# EAGLE board VCF-LM324-Stereo-LFO-PinHdr (EAGLE 7.2.0)
Voltage-Controlled Low-Pass Filter with LFO using LM324 Quad-Opamp (Stereo) http://electro-music.com/forum/topic-45231-0.html&postdays=0&postorder=asc&highlight=
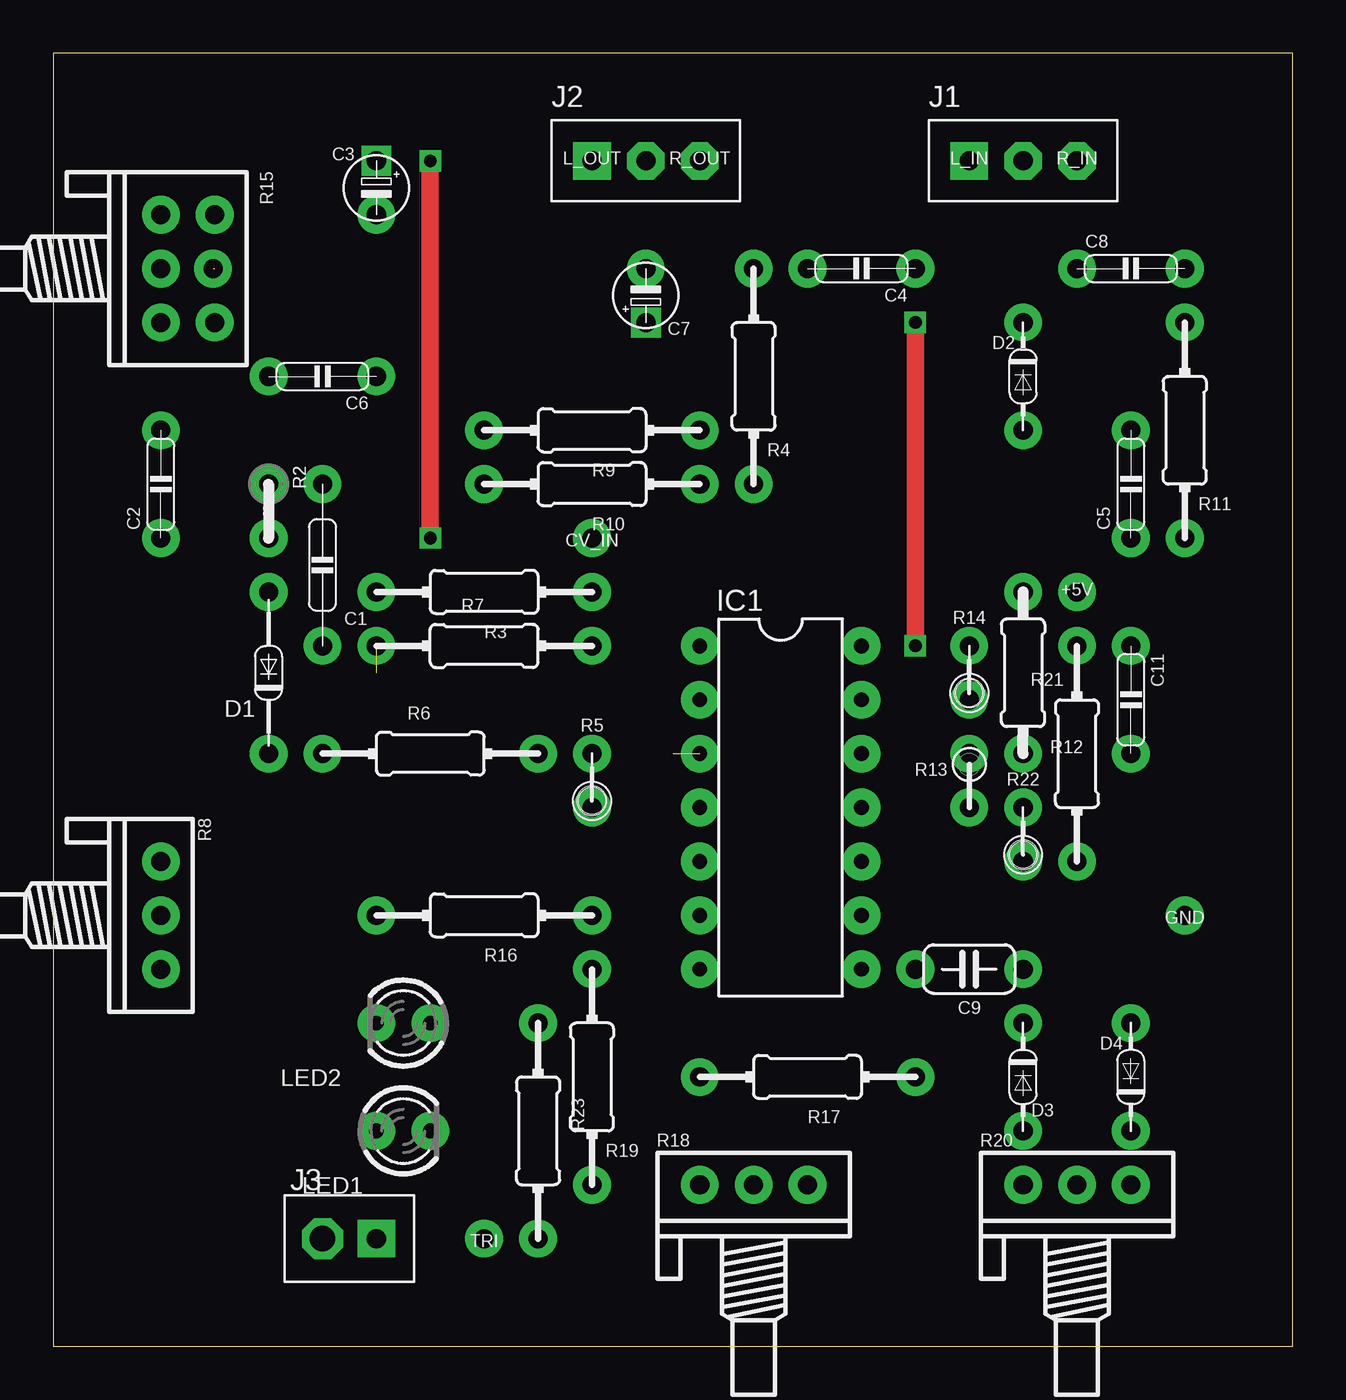
[diagram p0: board, top side]
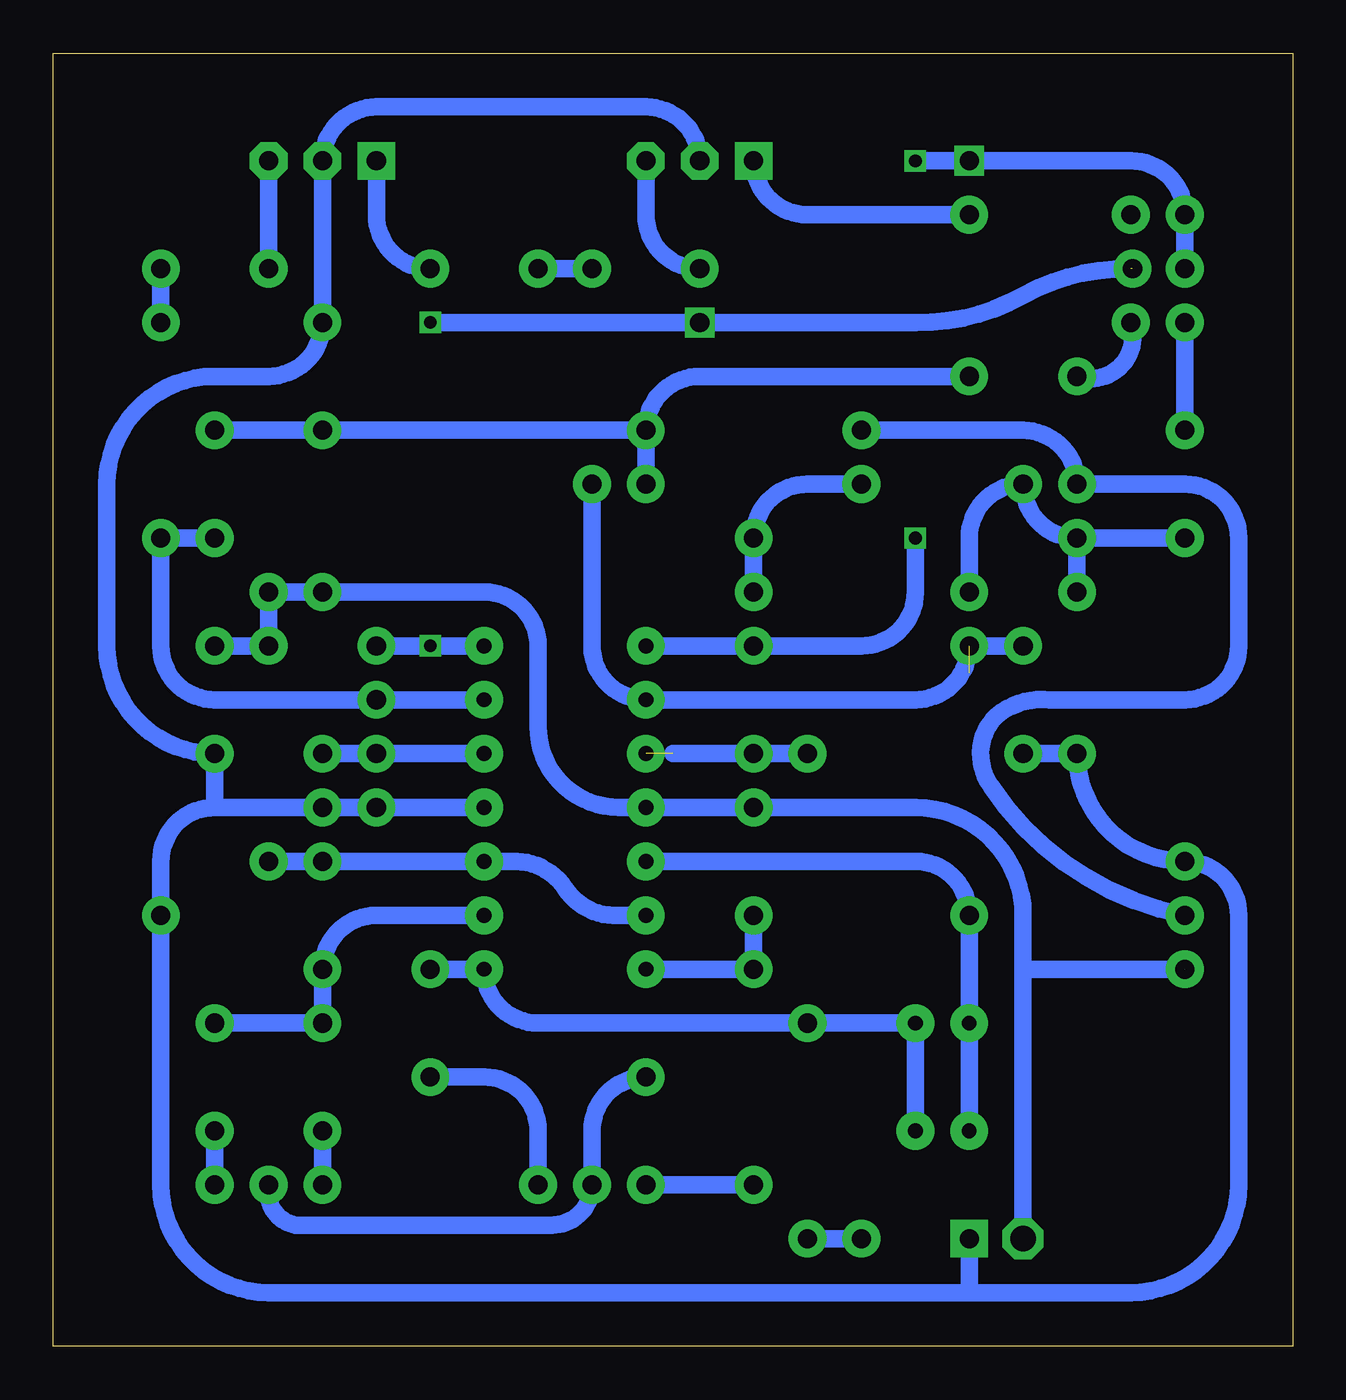
[diagram p1: board, bottom side, seen from below]

Size 58.42 x 60.96 mm. Coordinates in mm from the lower left corner, seen from the top.
Outline: 0,0 58.42,0 58.42,60.96 0,60.96 0,0
Copper layers (1*16): Top 0.035mm / dielectric 1.5mm / Bottom 0.035mm
Design rules "default *": minimum track width 10mil, minimum drill 24mil, track to track 8mil, track to pad 8mil, pad to pad 8mil, via to via 8mil, smd to smd 8mil, copper to edge 40mil, drill to drill 8mil, minimum pad ring 10mil, minimum via ring 8mil, stop-mask expansion 0mil, vias tented up to drill 0mil, thermal gap 10mil

## Footprints (pad centres in the part's own frame; a part is rotated, then mirrored left to right if it is on the bottom)
SPAD = drill 0.9 pad 1.778: 1 0,0
C075-020X044/V = drill 0.9 pad 1.778: 1 0,3.81; 2 0,-3.81
C050-020X044 = drill 0.9 pad 1.778: 1 -2.54,0; 2 2.54,0
E2,5-3/V = drill 0.9 square: + 0,1.27 | drill 0.9 pad 1.778: - 0,-1.27
C050-024X044 = drill 0.9 pad 1.778: 1 -2.54,0; 2 2.54,0
DO34-7V = drill 0.9 pad 1.778: A 0,-3.81; C 0,3.81
DO34-5-V = drill 0.9 pad 1.778: A 0,-2.54; C 0,2.54
DO34-5V = drill 0.9 pad 1.778: A 0,2.54; C 0,-2.54
DIL14 = drill 0.7 pad 1.778: 1 -3.81,7.62; 2 -3.81,5.08; 3 -3.81,2.54; 4 -3.81,0; 5 -3.81,-2.54; 6 -3.81,-5.08; 7 -3.81,-7.62; 8 3.81,-7.62; 9 3.81,-5.08; 10 3.81,-2.54; 11 3.81,0; 12 3.81,2.54; 13 3.81,5.08; 14 3.81,7.62
CONN-3P = drill 0.9 pad 1.778 square: 1 0,0 | drill 0.9 pad 1.778 octagon: 2 2.54,0; 3 5.08,0
CONN-2P = drill 0.9 pad 1.778 square: 1 0,0 | drill 1.2 pad 1.93 octagon: 2 -2.54,0
LED3MM = drill 0.7 pad 1.778: A -1.27,0; K 1.27,0
0204V = drill 0.9 pad 1.778: 1 -1.27,0; 2 1.27,0
0204/10 = drill 0.9 pad 1.778: 1 -5.08,0; 2 5.08,0
0204/10-V = drill 0.9 pad 1.778: 1 0,5.08; 2 0,-5.08
0204/2V = drill 0.9 pad 1.778: 1 0,1.27; 2 0,-1.27
POT = drill 0.9 pad 1.778: A -2.54,0; E 2.54,0; S 0,0
0204/7-V = drill 0.9 pad 1.778: 1 0,3.81; 2 0,-3.81
0202V = drill 0.9 pad 1.778: 1 0,-1.27; 2 0,1.27
POT-STEREO-2X3 = drill 0.9 pad 1.778: 1-A -2.54,-2.54; 1-E 2.54,-2.54; 1-S 0,-2.54; 2-A -2.54,0; 2-E 2.54,0; 2-S 0,-0.08

## Placement (x,y rotation side)
+5V  VCC  [SPAD]  48.26,35.56 270 top
C1  0.1μF  [C075-020X044/V]  12.7,36.83 180 top
C2  0.1μF  [C050-020X044]  5.08,40.64 90 top
C3  1μF  [E2,5-3/V]  15.24,54.61 0 top
C4  1μF  [C050-020X044]  38.1,50.8 180 top
C5  100nF  [C050-020X044]  50.8,40.64 90 top
C6  100nF  [C050-020X044]  12.7,45.72 180 top
C7  1μF  [E2,5-3/V]  27.94,49.53 180 top
C8  1μF  [C050-020X044]  50.8,50.8 0 top
C9  1μF  [C050-024X044]  43.18,17.78 180 top
C11  100nF  [C050-020X044]  50.8,30.48 270 top
CV_IN  CV_IN  [SPAD]  25.4,38.1 90 top
D1  1N4148  [DO34-7V]  10.16,31.75 180 top
D2  1N4148  [DO34-5-V]  45.72,45.72 0 top
D3  1N4148  [DO34-5V]  45.72,12.7 180 top
D4  1N4148  [DO34-5V]  50.8,12.7 0 top
GND  GND  [SPAD]  53.34,20.32 90 top
IC1  LM324  [DIL14]  34.29,25.4 0 top
J1  A_IN  [CONN-3P]  43.18,55.88 0 top
J2  A_OUT  [CONN-3P]  25.4,55.88 0 top
J3  CONN-2P2P/H  [CONN-2P]  15.24,5.08 0 top
L_IN  AUDIO_IN  [SPAD]  43.18,55.88 270 top
L_OUT  AUDIO_OUT  [SPAD]  25.4,55.88 270 top
LED1  [LED3MM]  16.51,10.16 0 top
LED2  [LED3MM]  16.51,15.24 180 top
R2  1kΩ  [0204V]  10.16,39.37 270 top
R3  1kΩ  [0204/10]  20.32,35.56 180 top
R4  470kΩ  [0204/10-V]  33.02,45.72 180 top
R5  100kΩ  [0204/2V]  25.4,26.67 0 top
R6  100kΩ  [0204/10]  17.78,27.94 0 top
R7  100kΩ  [0204/10]  20.32,33.02 0 top
R8  [POT]  5.08,20.32 270 top
R9  1kΩ  [0204/10]  25.4,43.18 180 top
R10  1kΩ  [0204/10]  25.4,40.64 180 top
R11  470kΩ  [0204/10-V]  53.34,43.18 180 top
R12  100kΩ  [0204/7-V]  45.72,31.75 180 top
R13  100kΩ  [0202V]  43.18,26.67 0 top
R14  100kΩ  [0204/2V]  43.18,31.75 0 top
R15  10kΩ  [POT-STEREO-2X3]  7.62,50.8 270 top
R16  47kΩ  [0204/10]  20.32,20.32 180 top
R17  4.7kΩ  [0204/10]  35.56,12.7 180 top
R18  10kΩ  [POT]  33.02,7.62 0 top
R19  4.7kΩ  [0204/10-V]  25.4,12.7 180 top
R20  100kΩ  [POT]  48.26,7.62 0 top
R21  100kΩ  [0204/10-V]  48.26,27.94 0 top
R22  100kΩ  [0204/2V]  45.72,24.13 0 top
R23  1kΩ  [0204/10]  22.86,10.16 270 top
R_IN  AUDIO_IN  [SPAD]  48.26,55.88 270 top
R_OUT  AUDIO_OUT  [SPAD]  30.48,55.88 270 top
TRI  TRIANGLE  [SPAD]  20.32,5.08 90 top

## Library data of the parts
+5V CV_IN GND L_IN L_OUT R_IN R_OUT TRI = pad
C1-C9 C11 = c
D1-D4 = d
IC1 = ic
J1-J3 = pinconn
LED1 LED2 = led
R2-R23 = r

## Nets
GND: C11.2 D1.C D2.C GND.1 IC1.11 J1.2 J2.2 J3.1 R6.1 R8.A R13.1 R22.1
LEFT_IN: C4.1 J1.1 L_IN.1
LEFT_OUT: C3.- J2.1 L_OUT.1
N$1: C6.2 R15.2-E
N$2: C1.1 IC1.2 R4.1 R7.1
N$3: C2.2 R15.1-E
N$4: C3.+ IC1.1 R7.2 R15.1-S
N$5: R2.1 R8.S R9.2
N$7: IC1.3 R5.1 R6.2
N$8: CV_IN.1 R3.1 R10.2
N$9: C1.2 C2.1 D1.A R2.2 R3.2
N$10: C4.2 R4.2
N$12: C7.+ IC1.14 R14.1 R15.2-S
N$13: IC1.12 R12.1 R13.2
N$14: IC1.7 R16.1 R19.2
N$15: IC1.5 LED1.A LED2.K R16.2
N$16: C5.2 C6.1 D2.A R9.1 R10.1
N$17: C5.1 IC1.13 R11.1 R14.2
N$20: C8.2 R11.2
N$26: C9.1 D3.C D4.A IC1.9
N$28: C9.2 IC1.8 LED1.K LED2.A R23.1
OA_C_IN+: IC1.6 IC1.10 R21.2 R22.2
RIGHT_IN: C8.1 J1.3 R_IN.1
RIGHT_OUT: C7.- J2.3 R_OUT.1
TRI_OUT: R23.2 TRI.1
TRIM_1_A: D3.A R20.A
TRIM_1_B: D4.C R20.E
TRIM_2_A: R17.1 R18.E
TRIM_2_B: R18.A R19.1
TRIM_P: R17.2 R18.S R20.S
VCC: +5V.1 C11.1 IC1.4 J3.2 R5.2 R8.E R12.2 R21.1

## Tracks (layer width: path | path; a pad name or v marks a point on that pad's centre or on a via)
GND
  Bottom 0.813: 44.45,25.4 R13.1 | R13.1 R22.1 | J2.2 arc-90 30.48,58.42 43.18,58.42 arc-90 J1.2 D2.C arc90 48.26,45.72 50.8,45.72 arc-90 55.88,40.64 55.88,33.02 arc-90 C11.2 50.8,25.4 | R13.1 IC1.11 R22.1 | R6.1 D1.C arc-90 R8.A arc90 2.54,20.32 2.54,7.62 arc90 7.62,2.54 15.24,2.54 | 15.24,2.54 48.26,2.54 arc90 53.34,7.62 GND.1 53.34,22.86 arc90 50.8,25.4 | 50.8,25.4 R22.1 | 15.24,2.54 J3.1
LEFT_IN
  Bottom 0.813: C4.1 arc90 43.18,53.34 J1.1
LEFT_OUT
  Bottom 0.813: C3.- 22.86,53.34 arc90 L_OUT.1
N$1
  Bottom 0.813: C6.2 arc-127 R15.2-E
N$2  (1 unrouted)
  Bottom 0.813: R4.1 33.02,33.02 arc-90 IC1.2 17.78,30.48 arc-90 R7.1 C1.1
N$3
  Bottom 0.813: C2.2 R15.1-E
N$4  (via drill 0.6)
  Top 0.813: v17.78,38.1 v17.78,55.88
  Bottom 0.813: IC1.1 R7.2 20.32,33.02 arc-90 17.78,35.56 v17.78,38.1 | v17.78,55.88 C3.+ 7.62,55.88 arc90 5.08,53.34 R15.1-S
N$5
  Bottom 0.813: R9.2 12.7,43.18 arc90 R2.1 5.08,40.64 arc90 2.54,38.1 2.54,33.02 arc90 5.08,30.48 11.43,30.48 arc-45 13.97,29.72 arc-80 14.22,26.42 arc-45 R8.S
N$7  (1 unrouted)
  Bottom 0.813: R6.2 R5.1 29.21,27.94
N$8
  Bottom 0.813: R3.1 CV_IN.1 arc90 22.86,40.64 R10.2
N$9
  Bottom 0.813: D1.A R2.2 | R3.2 15.24,38.1 arc90 C1.2 arc-90 R2.2 | C2.1 R2.2
N$10
  Bottom 0.813: R4.2 C4.2
N$12  (via drill 0.6)  (1 unrouted)
  Top 0.813: v40.64,33.02 v40.64,48.26
  Bottom 0.813: IC1.14 R14.1 v40.64,33.02 | C7.+ v40.64,48.26 17.78,48.26 arc-30 12.7,49.53 arc30 7.62,50.8
N$13
  Bottom 0.813: IC1.12 R13.2 R12.1
N$14
  Bottom 0.813: R16.1 R19.2 IC1.7
N$15
  Bottom 0.813: IC1.5 17.78,22.86 arc90 R16.2 LED2.K LED1.A
N$16
  Bottom 0.813: R9.1 D2.A C5.2 | C6.1 27.94,45.72 arc-90 R9.1 | R10.1 R9.1
N$17
  Bottom 0.813: IC1.13 R14.2 50.8,30.48 arc90 53.34,33.02 R11.1 C5.1
N$20
  Bottom 0.813: C8.2 R11.2
N$26
  Bottom 0.813: IC1.9 43.18,20.32 arc-90 C9.1 D3.C D4.A
N$28
  Bottom 0.813: C9.2 IC1.8 arc-90 35.56,15.24 R23.1 LED2.A LED1.K
OA_C_IN+
  Bottom 0.813: IC1.6 31.75,20.32 arc60 34.29,21.59 arc-60 36.83,22.86 IC1.10 R22.2 R21.2
RIGHT_IN
  Bottom 0.813: J1.3 C8.1
RIGHT_OUT
  Bottom 0.813: C7.- arc90 30.48,53.34 R_OUT.1
TRI_OUT
  Bottom 0.813: TRI.1 R23.2
TRIM_1_A
  Bottom 0.813: D3.A R20.A
TRIM_1_B
  Bottom 0.813: R20.E arc90 50.8,7.94 D4.C
TRIM_2_A
  Bottom 0.813: R18.E 35.56,10.16 arc-90 38.1,12.7 R17.1
TRIM_2_B
  Bottom 0.813: R19.1 R18.A
TRIM_P
  Bottom 0.813: R17.2 arc-90 33.02,10.16 R18.S arc90 34.92,5.71 46.99,5.71 arc90 R20.S
VCC  (1 unrouted)
  Bottom 0.813: C11.1 R21.1 +5V.1 R12.2 38.1,35.56 arc90 35.56,33.02 35.56,29.21 arc-90 31.75,25.4 IC1.4 R5.2 17.78,25.4 arc90 12.7,20.32 12.7,17.78 | 12.7,17.78 J3.2 | 12.7,17.78 R8.E

## Text on the board
tDocu: LFO freq | LFO duty
Contour: 23 | 22 | 21 | 20 | 19 | 18 | 17 | 16 | 15 | 14 | 13 | 12 | 11 | 10 | 9 | 8 | 7 | 6 | 5 | 4 | 3 | 2 | 1 | 1 | 2 | 3 | 4 | 5 | 6 | 7 | 8 | 9 | 10 | 11 | 12 | 13 | 14 | 15 | 16 | 17 | 18 | 19 | 20 | 21